# Altium PCB arduino-nano_v1.PcbDoc
Units mil, origin at the board's own origin, x right, y up, seen from the top; angles counter-clockwise.
Board outline 720 x 1780 mil, 8 copper layers (Top Layer, VCC, Signal Layer Top, Signal Layer Middle - 1, Signal Layer Middle - 2, Signal Layer Bottom, GND, Bottom Layer), stack 46.066 mil thick; 25 components, 42 nets, 165 pads, 78 vias.
Unrouted connection lines stored in the file: 18.
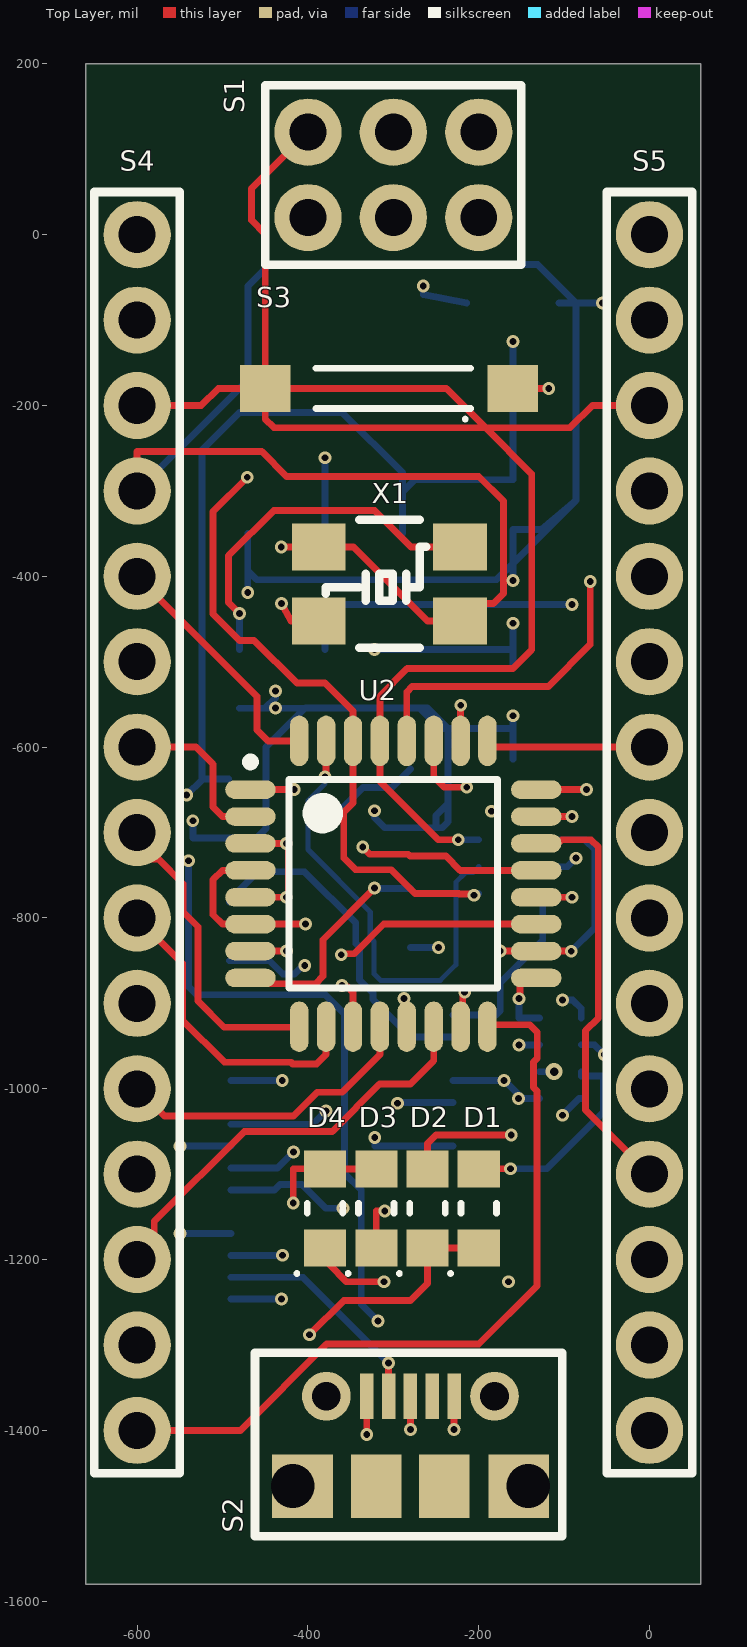
[diagram p0: Top Layer view]
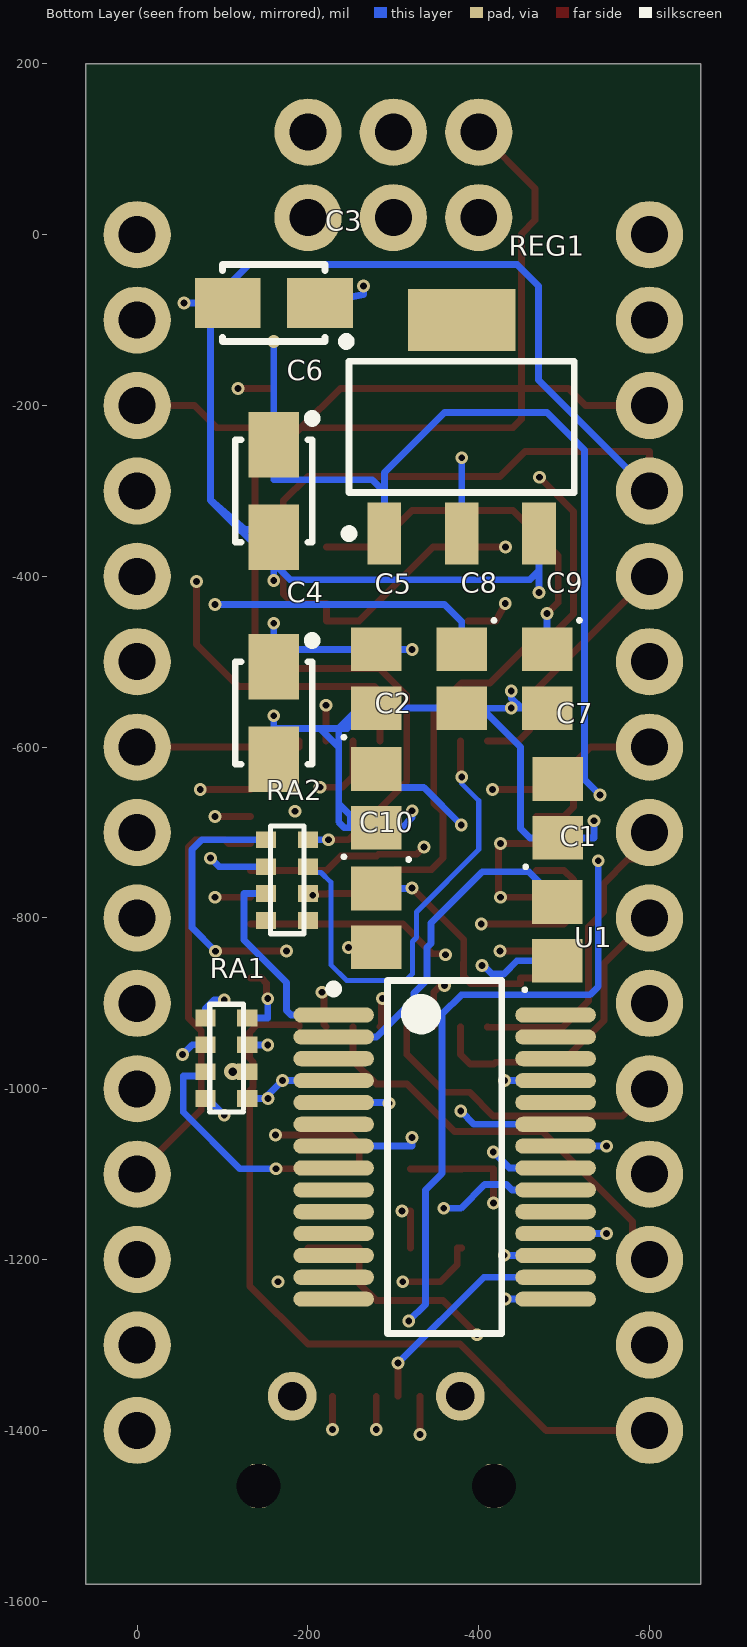
[diagram p1: Bottom Layer view, seen from below]
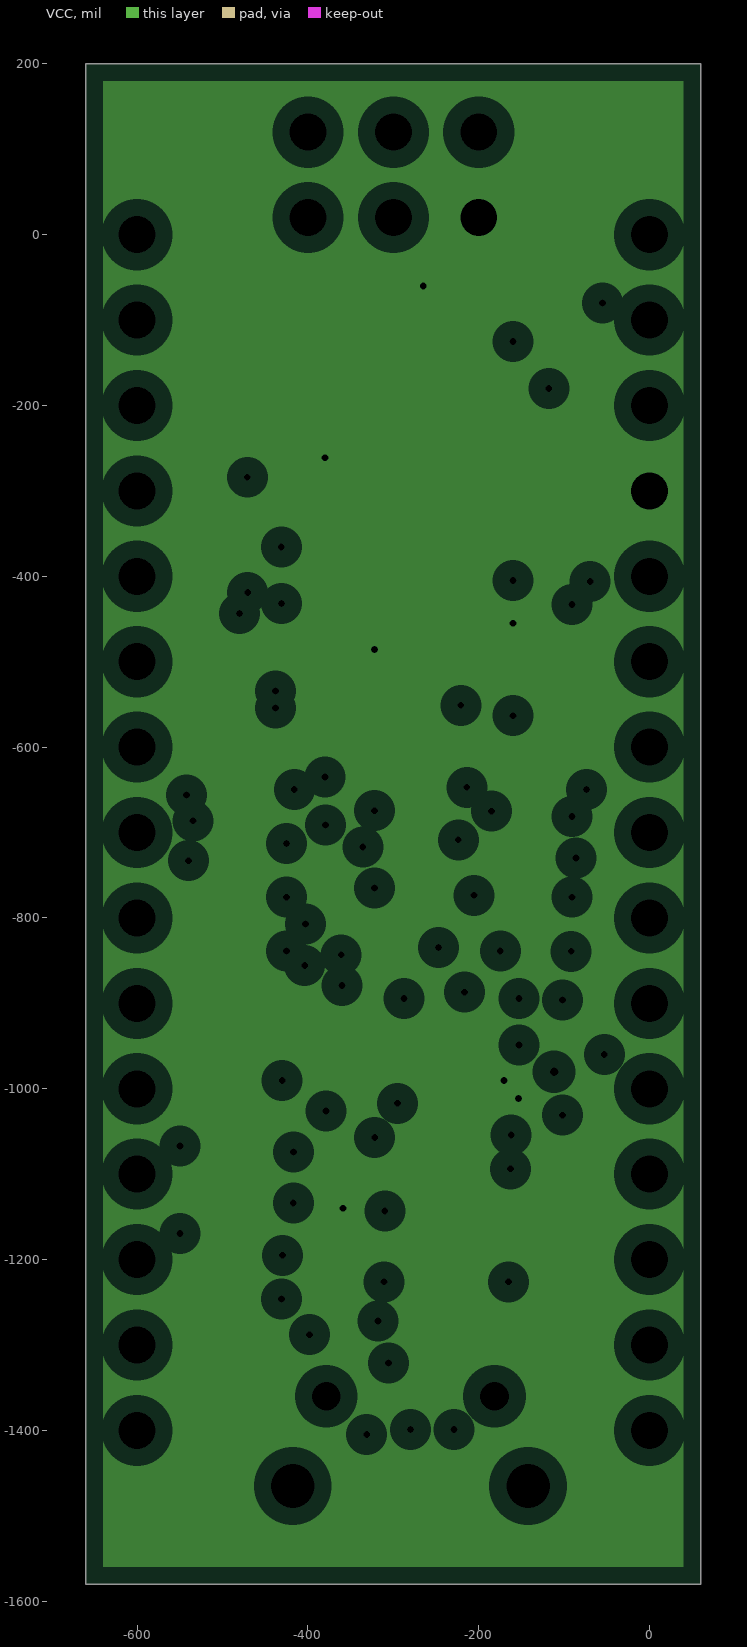
[diagram p2: VCC, clearances drawn from the general rule]
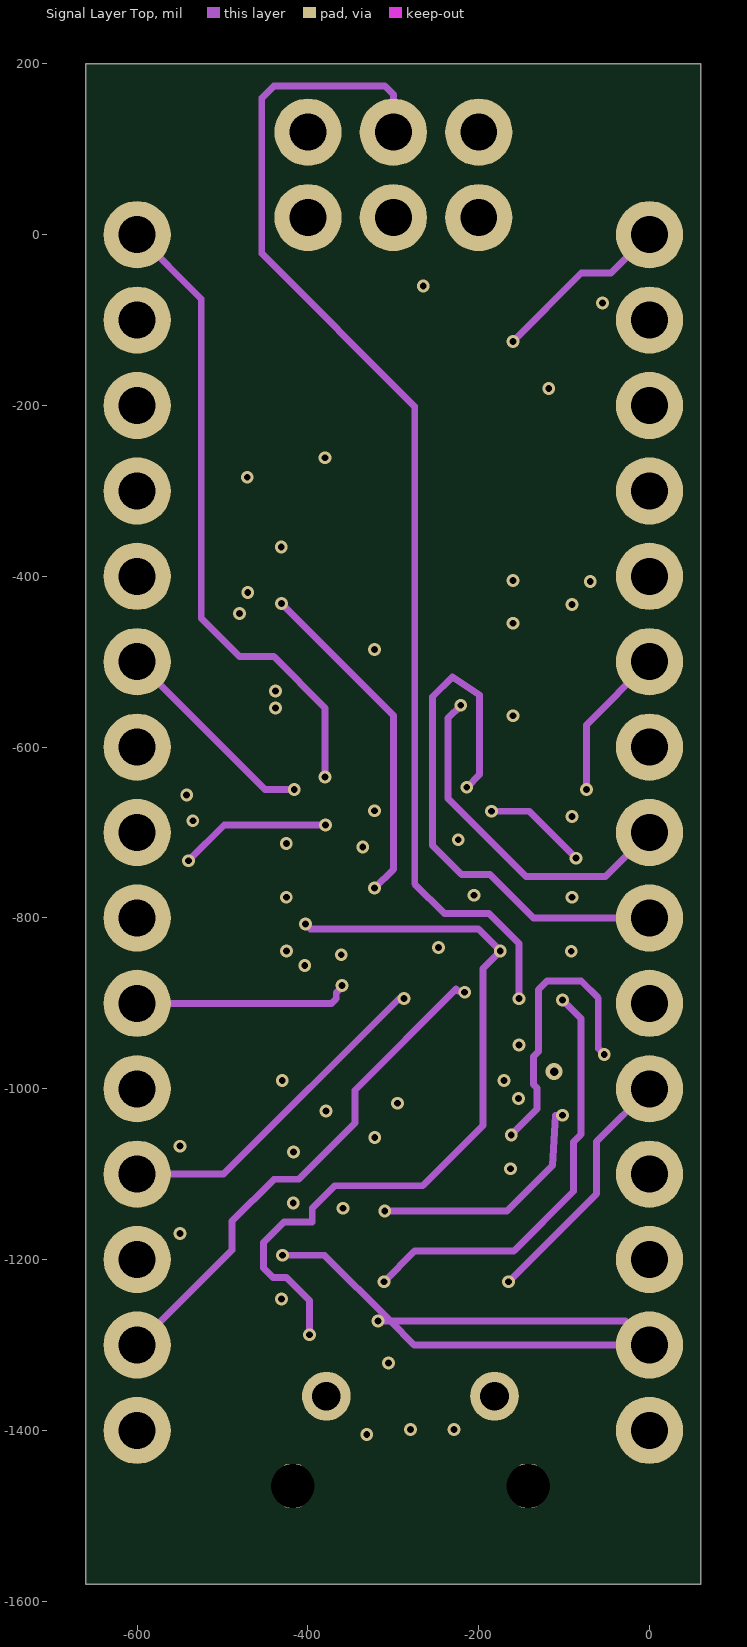
[diagram p3: Signal Layer Top]
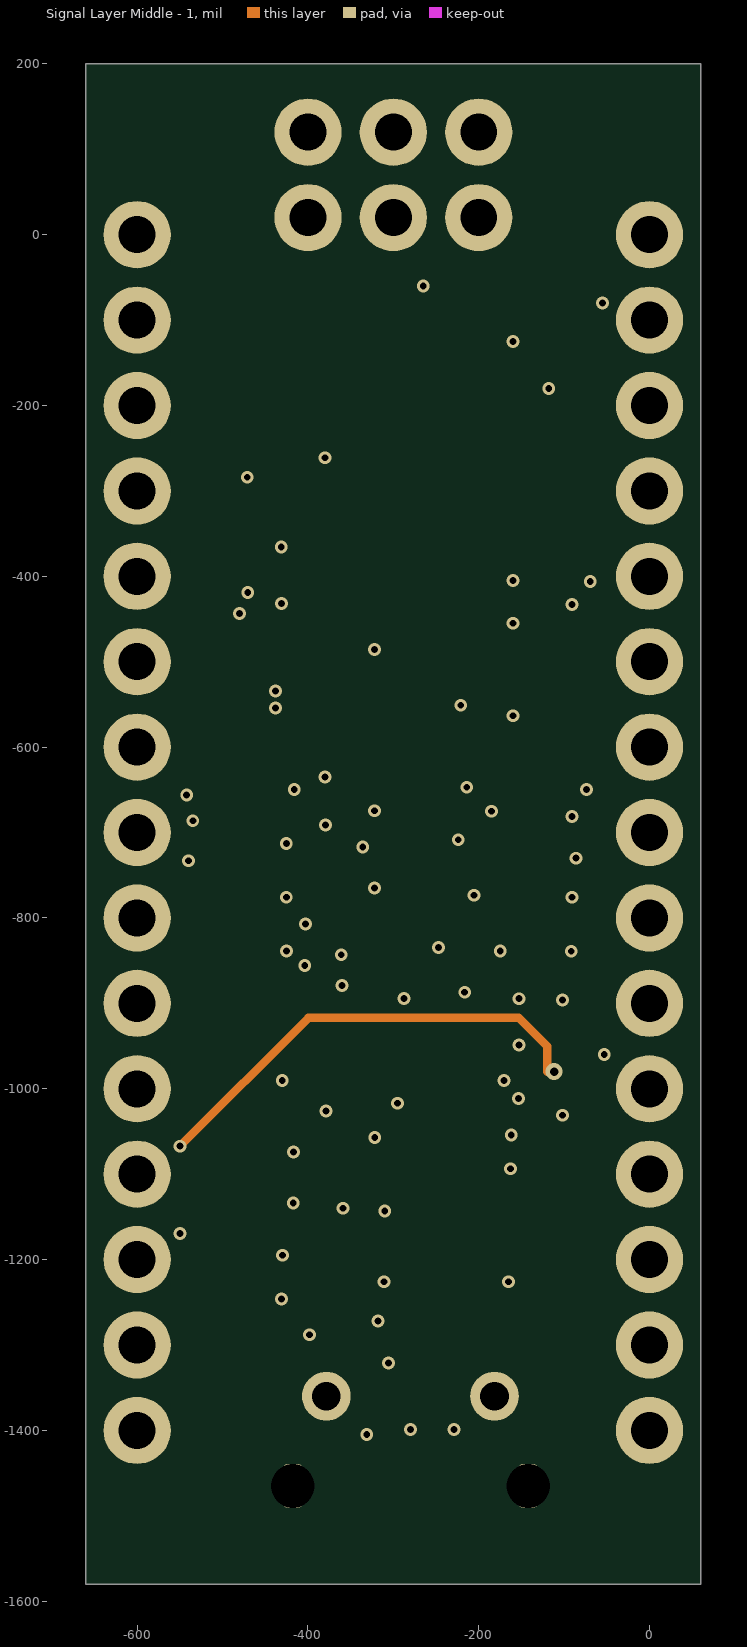
[diagram p4: Signal Layer Middle - 1]
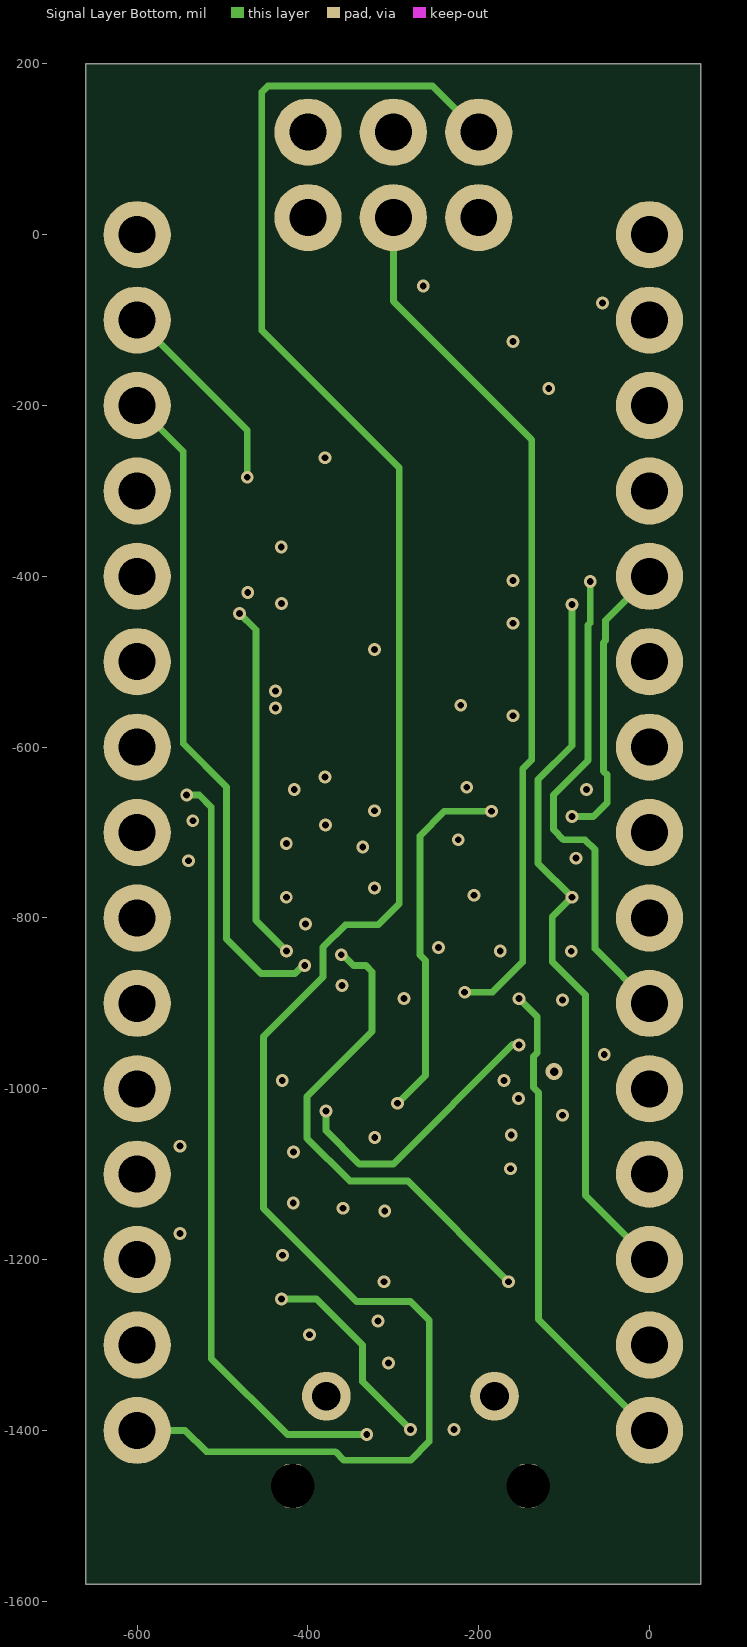
[diagram p5: Signal Layer Bottom]
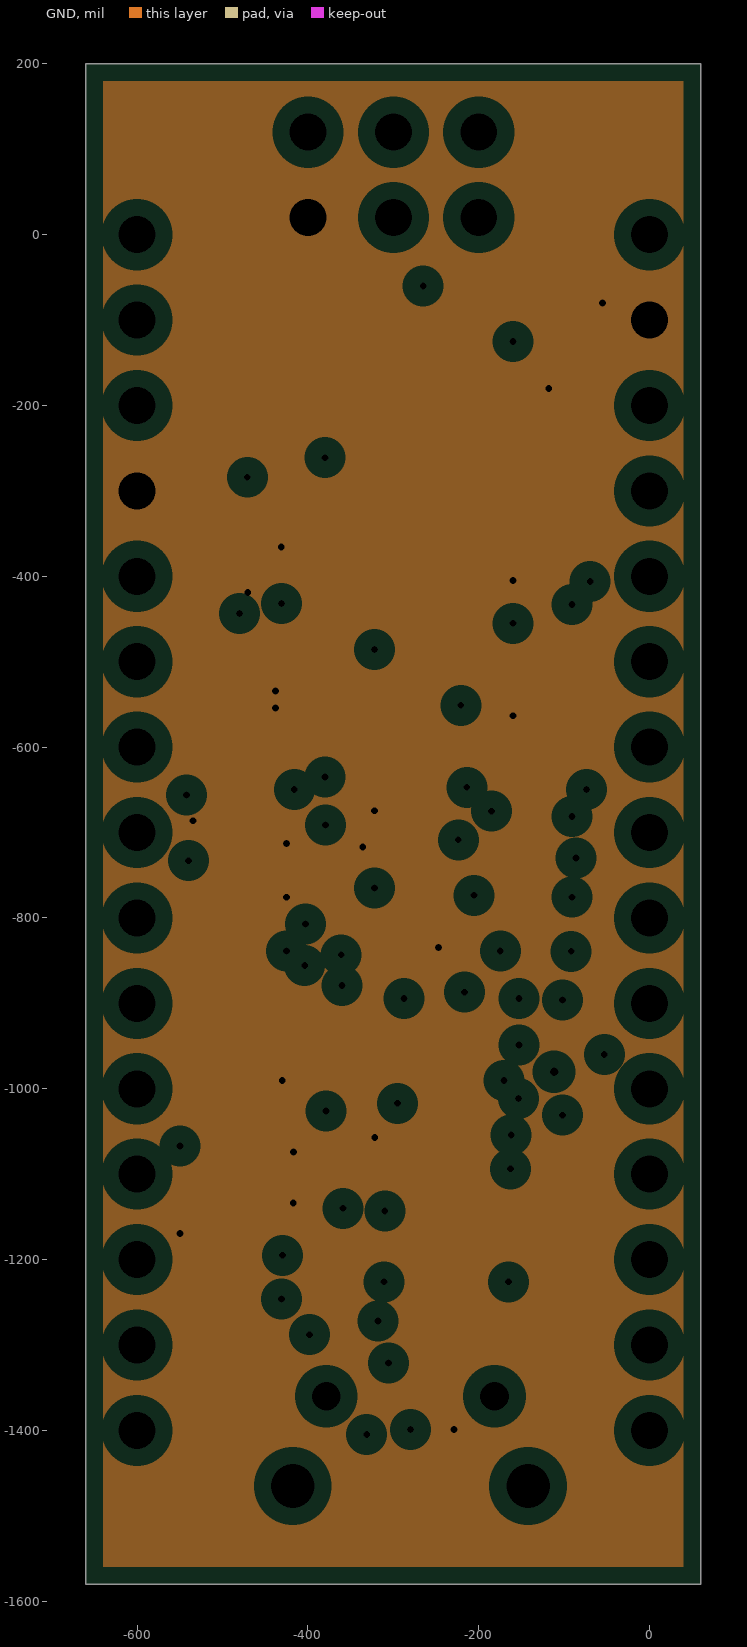
[diagram p6: GND, clearances drawn from the general rule]

## Layer stack, top to bottom
Top Solder: solder mask 0.4, Solder Resist, Dk 3.5
Top Layer: signal copper 1.4
Dielectric 2: prepreg 2.8, PP-006, Dk 4.1
VCC: plane copper 1.378, net 5V
Dielectric 6: prepreg 2.8, PP-006, Dk 4.1
Signal Layer Top: signal copper 1.378
Dielectric 8: prepreg 2.8, PP-006, Dk 4.1
Signal Layer Middle - 1: signal copper 1.378
Dielectric 4: prepreg 2.8, PP-006, Dk 4.1
Dielectric 1: dielectric 12.5984, FR-4, Dk 4.8
Dielectric 5: prepreg 2.8, PP-006, Dk 4.1
Signal Layer Middle - 2: signal copper 1.378
Dielectric 9: prepreg 2.8, PP-006, Dk 4.1
Signal Layer Bottom: signal copper 1.378
Dielectric 7: prepreg 2.8, PP-006, Dk 4.1
GND: plane copper 1.378, net GND
Dielectric 3: prepreg 2.8, PP-006, Dk 4.1
Bottom Layer: signal copper 1.4
Bottom Solder: solder mask 0.4, Solder Resist, Dk 3.5

## Board outline
-660,-1580 60,-1580 60,200 -660,200

## Design rules (kind name [scope] priority, off if disabled: settings)
Clearance [All] p1: gap=10 ignorepadtopadclearanceinfootprint=FALSE except(0: Arc-Hole Track-Hole SMDPad-Hole THPad-Hole Via-Hole Fill-Hole Poly-Hole Region-Hole Text-Hole)
PlaneClearance [All] p1: clearance=20
PlaneConnect [All] p1: planeconnectstyle=Relief reliefexpansion=20 reliefentries=4 reliefconductorwidth=10 reliefairgap=10
PolygonConnect [All] p1: connectstyle=Relief reliefconductorwidth=10 reliefentries=4 polygonreliefangle="90 Angle" airgapwidth=10
RoutingVias [All] p1: holewidth=8 width=15 viastyle="Through Hole" minholewidth=5 minwidth=10 maxholewidth=10 maxwidth=20
SolderMaskExpansion [All] p1: expansion=4 istentingtop=FALSE
Width [All] p1: maxlimit=8 minlimit=6 preferedwidth=8 midlayer1_minwidth=8 midlayer2_minwidth=8 midlayer3_minwidth=8 midlayer4_minwidth=8 minimp=50.000000 maximp=50.000000 favimp=50.000000
28 further rules are at their usual default settings.

## Components (designator, comment, footprint, x,y, rotation, side; value= is the part's Value field where it differs from the comment)
C1 "100nF Ceramic Multilayer Capacitor_1" CAPCP2012X09N -491.87,-815.68 r90 bottom
C2 "100nF Ceramic Multilayer Capacitor_1" CAPCP2012X09N -280,-660 r90 bottom
C3 "Capacitor SMT Tantalum" "CASE A - 3216X18" -160,-80 r0 bottom value=4.7µF
C4 "Capacitor SMT Tantalum" "CASE A - 3216X18" -160,-560 r270 bottom value=4.7µF
C5 "100nF Ceramic Multilayer Capacitor_1" CAPCP2012X09N -280,-520 r90 bottom
C6 "Capacitor SMT Tantalum" "CASE A - 3216X18" -160,-300 r270 bottom value=4.7µF
C7 "100nF Ceramic Multilayer Capacitor_1" CAPCP2012X09N -492.75,-671.76 r90 bottom
C8 "100nF Ceramic Multilayer Capacitor_1" CAPCP2012X09N -380,-520 r270 bottom
C9 "C0805C180J5GACTU" CAPCP2012X09N -480,-520 r270 bottom
C10 "C0805C180J5GACTU" CAPCP2012X09N -280,-800 r270 bottom
D1 "Kingbright Green LED, 70 mcd 120 ° 0805" LED1913X12NGREEN -200,-1140 r90 top
D2 "Kingbright Red LED, 100 mcd 120 ° 0805" LED1913X12NRED -260,-1140 r90 top
D3 "Kingbright Blue LED, 60 mcd 120 ° 0805" LED1913X12NBLUE -320,-1140 r90 top
D4 "Kingbright Orange LED, 200 mcd 120 ° 0805" LED1913X12NYEL/ORANGE -380,-1140 r90 top
RA1 "1k +- 5% SMT Resistor Array" "1206 RA" -124,-917.01 r270 bottom
RA2 "1k +- 5% SMT Resistor Array" "1206 RA" -195,-708.5 r270 bottom
REG1 "LM1117MP-5.0/NOPB, Low Dropout Voltage Regulator, 1.5A, 5 V ±1%, 4-Pin SOT-223" SOT230P700X180-4N -380,-225 r90 bottom
S1 "Programming Headers Dual Row" "ISP HEADER" 495,-435 r180 top
S2 "NewMolex Right Angle SMT Female Type B Micro USB Connector, 30 V ac, 1.8A" MicroUSB -328.42,-1360 r0 top
S3 "Tactile Switch SPST- NO 0.05A @24V" Button8014X17N -300,-180 r180 top
S4 "connector;str header;single row;.1 cont centers;.095 tail;gold or gtx;36 contact" Header -600,0 r270 top
S5 "connector;str header;single row;.1 cont centers;.095 tail;gold or gtx;36 contact" Header 0,0 r270 top
U1 "FT232RL, Universal Asynchronous Receiver & Transmitter 3MBd, 28-Pin, SSOP" SOP65P780X200-28N -360,-1080 r180 bottom
U2 "ATMEGA328P-AU" TQFP80P900X900X120-32N -300,-760 r0 top
X1 "Aker 16MHz Crystal SMT" "Aker S5C Crystal" -221.89,-365.51 r0 top value=16MHz

## Footprints (in the part's own frame and the unit in brackets; to place one, negate y for a bottom-side part, rotate by r counter-clockwise, add the part's x,y. Pads: shape width x height; smd on the part's side, far side on the other; paste and mask are expansions set on the pad)
"1206 RA" [mm]
  rect 0.5x0.6 smd: 1(0,0.127) 2(0.8,0.127) 3(1.6,0.127) 4(2.4,0.127) 5(0,-1.118) 6(0.8,-1.118) 7(1.6,-1.118) 8(2.4,-1.118)
  silkscreen extent -0.41,-0.99 2.79,0.01, body extent -0.41,-1.31 2.79,0.29, height 0.5
"Aker S5C Crystal" [mm]
  rect 1.6x1.4 smd: 1(0,0) 2(-4.2,0) 3(0,-2.2) 4(-4.2,-2.2)
  round 0.254 on Top Overlay: 5(-3,-2.4)
  silkscreen extent -4,-3 -1,0.8, body extent -4.7,-2.8 0.5,0.6, height 1
Button8014X17N [mm] "Chip Inductor, 2-Leads, Body 8.00x1.40mm, IPC Medium Density"
  rect 1.5x1.4 smd: 1(-3.556,0) 2(3.81,0)
  silkscreen extent -2.3,-0.6 2.3,0.96, body extent -3.79,-1.92 4.21,1.78, height 2.5
CAPCP2012X09N [mm] "Chip Capacitor, 2-Leads, Body 2.00x1.25mm, IPC Medium Density"
  rect 1.3x1.5 smd: 1(-0.875,0) 2(0.875,0)
  silkscreen extent -1.79,0.91 -1.69,1.01, body extent -1.05,-0.57 0.95,0.68, height 0.78
"CASE A - 3216X18" [mm] "Molded Capacitor, 2-Leads, Body 3.2x1.6mm, IPC Medium Density"
  rect 1.95x1.5 smd: 1(-1.375,0) 2(1.375,0)
  silkscreen extent -2.28,-1.14 1.52,1.27, body extent -1.52,-0.76 1.65,0.84, height 1.77
Header [mm] "SIL Header"
  round 2 hole 1.1: 1(0,0) 2(2.54,0) 3(5.08,0) 4(7.62,0) 5(10.16,0) 6(12.7,0) 7(15.24,0) 8(17.78,0) 9(20.32,0) 10(22.86,0) 11(25.4,0) 12(27.94,0) 13(30.48,0) 14(33.02,0) 15(35.56,0)
  silkscreen extent -1.27,-1.27 36.83,1.27, body extent -1.33,-1.35 36.93,1.35, height 8.6
"ISP HEADER" [mm] "SIL Header for programming"
  round 2 hole 1.1: 1(17.653,-14.097) 2(17.653,-11.557) 3(20.193,-14.097) 4(20.193,-11.557) 5(22.733,-14.097) 6(22.733,-11.557)
  silkscreen extent 16.38,-15.49 24,-10.16, body extent 16.38,-15.37 24,-10.29, height 8
LED1913X12NBLUE [mm] "LED 2-Leads, Body 1.90x1.32mm, IPC Medium Density"
  rect 1.1x1.25 smd: 1(-1.175,0) 2(1.175,0)
  silkscreen extent -1.99,-0.53 0.15,0.89, body extent -1,-0.62 1.02,0.62, height 1.1
LED1913X12NGREEN [mm] "LED 2-Leads, Body 1.90x1.32mm, IPC Medium Density"
  rect 1.1x1.25 smd: 1(-1.175,0) 2(1.175,0)
  silkscreen extent -1.99,-0.53 0.15,0.89, body extent -1.01,-0.62 1.01,0.63, height 1.1
LED1913X12NRED [mm] "LED 2-Leads, Body 1.90x1.32mm, IPC Medium Density"
  rect 1.1x1.25 smd: 1(-1.175,0) 2(1.175,0)
  silkscreen extent -1.99,-0.53 0.15,0.89, body extent -1.02,-0.43 1.04,0.47, height 0.85
LED1913X12NYEL/ORANGE [mm] "LED 2-Leads, Body 1.90x1.32mm, IPC Medium Density"
  rect 1.1x1.25 smd: 1(-1.175,0) 2(1.175,0)
  silkscreen extent -1.99,-0.53 0.15,0.89, body extent -1.01,-0.62 1.01,0.63, height 1.1
MicroUSB [mm] "MicroUSB  Molex 5Pin"
  rect 0.4x1.35 smd: 1(-0.07,0) 2(0.58,0) 3(1.23,0) 4(1.88,0) 5(2.53,0)
  rrect50% 0.6x1.3 hole 1.3: ""(-2.27,-2.667) ""(-2.27,-2.667) ""(4.73,-2.667)
  rect 1.8x1.9 smd: ""(-1.98,-2.678) ""(4.45,-2.678)
  round 1.45 hole 0.85: ""(-1.27,0) ""(3.73,0)
  rect 1.5x1.9 smd: ""(0.218,-2.678) ""(2.242,-2.678)
  silkscreen extent -3.39,-4.17 5.75,1.3, body extent -2.83,-5.32 5.37,0.11, height 2.68
SOP65P780X200-28N [mm] "SOP, 28-Leads, Body 10.20x5.30mm, Pitch 0.65mm, IPC Medium Density"
  oval 2.4x0.45 smd: 1(-3.3,4.225) 2(-3.3,3.575) 3(-3.3,2.925) 4(-3.3,2.275) 5(-3.3,1.625) 6(-3.3,0.975) 7(-3.3,0.325) 8(-3.3,-0.325) 9(-3.3,-0.975) 10(-3.3,-1.625) 11(-3.3,-2.275) 12(-3.3,-2.925) 13(-3.3,-3.575) 14(-3.3,-4.225) 15(3.3,-4.225) 16(3.3,-3.575) 17(3.3,-2.925) 18(3.3,-2.275) 19(3.3,-1.625) 20(3.3,-0.975) 21(3.3,-0.325) 22(3.3,0.325) 23(3.3,0.975) 24(3.3,1.625) 25(3.3,2.275) 26(3.3,2.925) 27(3.3,3.575) 28(3.3,4.225)
  silkscreen extent -3.43,-5.25 1.7,5.25, body extent -3.91,-5.1 3.91,5.1, height 2
SOT230P700X180-4N [mm] "SOT223, 4-Leads, Body 6.50x7.00mm (avg), Pitch 2.30mm, IPC Medium Density"
  rect 1.85x1 smd: 1(-3.175,2.3) 2(-3.175,0) 3(-3.175,-2.3)
  rect 1.85x3.2 smd: 4(3.175,0)
  silkscreen extent -3.3,-3.35 1.95,3.48, body extent -3.8,-3.12 3.29,3.38, height 1.65
TQFP80P900X900X120-32N [mm] "TQFP, 32-Leads, Body 7.00x7.00mm, Pitch 0.80mm, IPC Medium Density"
  oval 1.5x0.55 smd: 1(-4.25,2.8) 2(-4.25,2) 3(-4.25,1.2) 4(-4.25,0.4) 5(-4.25,-0.4) 6(-4.25,-1.2) 7(-4.25,-2) 8(-4.25,-2.8) 17(4.25,-2.8) 18(4.25,-2) 19(4.25,-1.2) 20(4.25,-0.4) 21(4.25,0.4) 22(4.25,1.2) 23(4.25,2) 24(4.25,2.8)
  oval 0.55x1.5 smd: 9(-2.8,-4.25) 10(-2,-4.25) 11(-1.2,-4.25) 12(-0.4,-4.25) 13(0.4,-4.25) 14(1.2,-4.25) 15(2,-4.25) 16(2.8,-4.25) 25(2.8,4.25) 26(2,4.25) 27(1.2,4.25) 28(0.4,4.25) 29(-0.4,4.25) 30(-1.2,4.25) 31(-2,4.25) 32(-2.8,4.25)
  silkscreen extent -4.37,-3.1 3.1,3.75, body extent -4.43,-4.5 4.57,4.5, height 1.6

## Part data
C1 C2 C5 C7 C8: "AVX 0805 Standard 100nF Ceramic Multilayer Capacitor, 50 V dc X7R Dielectric ±10% SMD", Capacitance=100nF, Manufacturer=AVX, Package=0805, Voltage=50V, Creator="Ritesh Kanjee", Datasheet URL=http://za.rs-online.com/web/p/ceramic-multilayer-capacitors/4646688/, Date Created="18 February 2015", RS Stock No.=464-6688
C3 C4 C6: library part "4.7µF Tant RS 496-3545", "Capacitor,tantalum,SMT,16V,4.7uF,10%,A-case", Package=3216-18, Tolerance=10%, Voltage=16V, ComponentLink1Description="Supplier Website", ComponentLink1URL=http://za.rs-online.com/web/search/searchBrowseAction.html?method=getProduct&R=4963545, ComponentLink2Description="RS Data sheet", ComponentLink2URL=http://docs-europe.origin.electrocomponents.com/webdocs/04ed/0900766b804ed4cc.pdf, LatestRevisionDate=28-April-2010, Part Originator="H Theron", Publisher=DPSS, RS Stock Nr.=496-3545
C9 C10: library part "18pF Ceramic Multilayer Capacitor, 50 V dc C0G Dielectric ±5% SMD", "18pF Ceramic Multilayer Capacitor, 50 V dc C0G Dielectric ±5% SMD", Capacitance=18pF, Manufacturer=Kemet, Package=0805, Voltage=50V, Creator="Ritesh Kanjee", Datasheet URL=http://za.rs-online.com/web/p/ceramic-multilayer-capacitors/6480935/?searchTerm=C0805C180J5GACTU&relevancy-data=636F3D3226696E3D4931384E4B6E6F776E41734D504E266C753D656E266D6D3D6D61746368616C6C7061727469616C26706D3D5E5B5C707B4C7D5C707B4E647D2D2C2F255C2E5D2B2426706F3D313326736E3D592673743D4D414E5F504152545F4E554D4245522677633D424F5448267573743D4330383035433138304A35474143545526, Date Created="18 February 2015", RS Stock No.=648-0935
D1: Color=Green, Forward Voltage="2.1 V", Manufacturer=KingBright, Manufacturer Part No.=KP-2012MGC, Creator="Ritesh Kanjee", Datasheet URL=http://za.rs-online.com/web/p/visible-leds/4663778/, Date Created="18 February 2015", RS Stock No.=466-3778
D2: Color=RED, Forward Voltage=1.85V, Manufacturer=KingBright, Manufacturer Part No.=KP-2012SRC-PRV, Creator="Ritesh Kanjee", Datasheet URL=http://za.rs-online.com/web/p/visible-leds/4663813/, Date Created="18 February 2015", RS Stock No.=466-3813
D3: Color=Blue, Forward Voltage=3.2V, Manufacturer=KingBright, Manufacturer Part No.=KP-2012PBC-A, Creator="Ritesh Kanjee", Datasheet URL=http://za.rs-online.com/web/p/visible-leds/4663784/, Date Created="18 February 2015", RS Stock No.=466-3784
D4: Color=Orange, Forward Voltage=1.85V, Manufacturer=KingBright, Manufacturer Part No.=KP-2012SEC, Creator="Ritesh Kanjee", Datasheet URL=http://za.rs-online.com/web/p/visible-leds/4663790/, Date Created="18 February 2015", RS Stock No.=466-3790
RA1 RA2: "1k +- 5% SMT Resistor Array 4 Res", Manufacturer=Bourns, Manufacturer Part No.=CAY16-102J4LF, Creator="R Kanjee", Date Created="25 February 2015", RS Stock No.=552-5579, Wattage=0.25W
REG1: library part LM1117MP-5.0, Manufacturer="Texas Instruments", Maximum Input Voltage=15V, Output Voltage=5V, Supply Current=1.5Amps, Created By="R Kanjee", Datasheet URL=http://za.rs-online.com/web/p/low-dropout-voltage-regulators/5339583/, Date Created="26 February 2015", RS Stock No.=533-9583
S1: library part "Programming ISP, Programming Headers Dual Row", Current Rating="3Amps Continuous", Manufacturer=FCI, Manufacturer Part No.=68000-236HLF, Created By="R Kanjee", Date Created="1 March 2015", RS Stock No.=2509565626
S2: library part "Micro USB Connector, 30 V ac, 1.8A", Manufacturer=Molex, Manufacturer Part No.=105017-0001, Max Current=1.8A, Max Voltage=30V, Creator="R Kanjee", Datasheet URL=http://za.rs-online.com/web/p/micro-usb-connectors/8486764/, Date Created="28 February 2015", RS Stock No=848-6764
S3: Manufacturer=Omron, Manufacturer Part No.=B3F1000, Creator="R Kanjee", Date Created="25 February 2015", RS Stock No.=686-6847, State="Normaly Open"
S4 S5: library part "Single row; PCB headers", Current Rating="3Amps Continuous", Manufacturer=FCI, Manufacturer Part No.=68000-236HLF, Created By="R Kanjee", Date Created="1 March 2015", RS Stock No.=2509565626
U1: library part "FT232RL USB to UART, Universal Asynchronous Receiver & Transmitter 3MBd, 28-Pin, SSOP", Manufacturer="FTDI Chip", Manufacturer Part No.=FT232RL, Creator="R Kanjee", Date Created="03 March 2015", Pin Count=28, RS Stock No.=406-580
U2: "Microchip ATMEGA328P-AU, 8bit AVR Microcontroller, 20MHz, 1 kB, 32 kB Flash, 32-Pin TQFP", Company=ComputeChip, Created By="Rajiv Bishwokarma", Datasheet URL=https://docs.rs-online.com/5775/0900766b80db4deb.pdf, Date Created="December 31, 2020", RS Stock No.=696-3092
X1: library part "Aker  C5S-16.000-12-3030-X", "Aker S5C SMT Crystal", Frequency Stability=+/-30ppm, Load Capacitance=12pF, Manufacturer=Aker, Manufacturer Part #=C5S-16.000-12-3030-X, Package="3.2x5mm SMD", Creator="R Kanjee", HelpURL=http://za.rs-online.com/web/p/crystal-units/6719488/, RS="RS 671-9488", RS Stock Nr.=671-9488, Supplier=RS

## Via types
v1: diameter 15, hole 8, Top Layer to Bottom Layer, 77 vias
v2: diameter 20, hole 10, Top Layer to Bottom Layer, 1 vias

## Nets (pads, with @x,y where several pads share a name; then routed paths per layer and width w, separated by ;. In a path a pad name is that pad's centre, name@x,y a point inside that pad or via, vN(x,y) a via of type N, cw(c..) or ccw(c..) an arc to the next point about the centre after c; other vN are vias at no path point)
3V3: C2.2 S5.14 U1.17 | length 1886.7
  Signal Layer Top w8: v1(-540,-733) -498,-691 v1(-379.5,-691) ; v1(-429.84,-1195) -380.54,-1195 -303.54,-1272 ; v1(-318,-1272) -303.54,-1272 ; -303.54,-1272 -28,-1272 S5.14 -275.54,-1300 -303.54,-1272
  Bottom Layer w8: v1(-540,-733) -540,-880 -530,-890 -379.53,-890 -357,-912.53 -357,-1099 -337.5,-1118.5 -337.5,-1252.5 v1(-318,-1272) ; U1.17 -430,-1195.16 v1(-429.84,-1195) ; v1(-379.5,-691) -335.64,-647.14 -301.59,-647.14 C2.2
5V: C3.1 C4.1 C5.2 RA1.4 REG1.2 S1.2 S5.4 U1.4 U1.20 | length 663.3
  Bottom Layer w8: U1.20 -439,-1118.39 -432.61,-1112 -407,-1112 -379,-1140 v1(-359,-1140) ; REG1.2 v1(-380,-261.08) ; v1(-322.03,-485.55) C5.2 -160,-485.55 C4.1 v1(-160,-454.98) ; v1(-265.02,-60) -265.02,-70 C3.1 ; U1.4 v1(-170.33,-990.43) -170,-990.43 -148.94,-1011.5 RA1.4 v1(-153.31,-1011.5)
+5: D1.1 D2.1 RA2.5 U2.4 U2.6 U2.18 | length 1688.3
  Top Layer w8: U2.4 -500,-744.25 -511,-755.25 -511,-796.24 -500,-807.24 U2.6 v1(-403,-807.24) ; v1(-398,-1288) -358,-1248 -280,-1248 -260,-1228 D2.1 D1.1 ; v1(-174.74,-838.74) U2.18 -92,-838.74 v1(-91.74,-839)
  Signal Layer Top w8: v1(-403,-807.24) -397.3,-812.95 -200.53,-812.95 v1(-174.74,-838.74) -195,-859 -195,-1043 -265.5,-1113.5 -368.5,-1113.5 -395,-1140 -395,-1156 -428,-1156 -452,-1180 -452,-1210 -441,-1221 -425,-1221 -398,-1248 v1(-398,-1288)
  Bottom Layer w8: RA2.5 -107.5,-708.5 -75.65,-708.5 -64.15,-720 -64.15,-811.41 v1(-91.74,-839)
A0: S5.5 U2.23 | length 379.1
  Top Layer w8: U2.23 v1(-91,-681.26)
  Signal Layer Bottom w8: v1(-91,-681.26) -65.84,-681.26 -49.5,-664.92 -49.5,-632.76 -54,-628.26 -54,-477.75 -51.5,-475.25 -51.5,-451.5 S5.5
A1: S5.6 U2.24 | length 239.1
  Top Layer w8: U2.24 v1(-74,-649.76)
  Signal Layer Top w8: v1(-74,-649.76) -74,-574 S5.6
A2: S5.7 U2.25 | length 197.1
  Top Layer w8: U2.25 -189.76,-600 S5.7
A3: S5.8 U2.26 | length 452.2
  Top Layer w8: U2.26 -221.26,-551.26 v1(-221,-551)
  Signal Layer Top w8: v1(-221,-551) -236,-566 -236,-660 -144.5,-751.5 -51.5,-751.5 S5.8
A4: S5.9 U2.27 | length 733.8
  Top Layer w8: U2.27 -252.76,-634.24 -240,-647 v1(-214,-647)
  Signal Layer Top w8: v1(-214,-647) -199,-632 -199,-539 -231,-518 -254,-541 -254,-715 -220,-749 -187,-749 -136,-800 S5.9
A5: S5.10 U2.28 | length 942.1
  Top Layer w8: U2.28 -284.25,-535.25 -278,-529 -118.5,-529 -69.5,-480 v1(-69.5,-406)
  Signal Layer Bottom w8: v1(-69.5,-406) -69.5,-454.5 -72,-457 -72,-615.5 -112.5,-656 -112.5,-696.5 -100.5,-708.5 -75.5,-708.5 -64,-720 -64,-836 S5.10
A6: S5.11 U2.19 | length 1113.9
  Top Layer w8: v1(-361.03,-843.17) -359.86,-842 -346,-842 -311.24,-807.24 U2.19
  Signal Layer Top w8: v1(-165,-1226) -62,-1123 -62,-1062 S5.11
  Signal Layer Bottom w8: v1(-361.03,-843.17) -359.13,-843.17 -346.48,-855.82 -332.18,-855.82 -325,-863 -325,-933 -401,-1009 -401,-1058 -351,-1108 -283,-1108 v1(-165,-1226)
A7: S5.12 U2.22 | length 498.3
  Top Layer w8: U2.22 -107.15,-712.76 -102.89,-708.5 -68.41,-708.5 -60,-716.91 -60,-917 -75,-932 -75,-1025 S5.12
AREF: C8.1 S5.13 U2.20 | length 1228
  Top Layer w8: U2.20 v1(-91,-775.75)
  Signal Layer Bottom w8: v1(-91,-433) -91,-598.38 -130.5,-637.88 -130.5,-736.25 v1(-91,-775.75) -114,-798.75 -114,-851 -75,-890 -75,-1125 S5.13
  Bottom Layer w8: C8.1 -380,-453 -360,-433 v1(-91,-433)
D0/RX: RA2.3 S4.2 U2.30 | length 978.4
  Top Layer w8: v1(-471,-284) -511,-324 -511,-444 -480,-475 -463,-475 -413,-525 -380,-525 -347.24,-557.76 U2.30 -347.24,-665.45 -358,-676.21 -358,-730 -344.5,-743.5 -302.5,-743.5 -274.5,-771.5 -223.5,-771.5 -222.89,-772.11 -207.05,-772.11 v1(-205.71,-773.45)
  Signal Layer Bottom w8: S4.2 -471,-229 v1(-471,-284)
  Bottom Layer w8: v1(-205.71,-773.45) -201.95,-773.45 RA2.3
D1/TX: RA2.2 S4.1 U2.31 | length 1300.5
  Top Layer w8: v1(-380,-635) -378.74,-633.74 U2.31
  Signal Layer Top w8: S4.1 -525,-75 -525,-449 -480,-494 -440,-494 -380,-554 v1(-380,-635)
  Bottom Layer w6: v1(-380,-635) -380,-642.76 -400,-662.76 -400,-720 -327,-793 -327,-823 -322.53,-827.47 -322.53,-865.42 -314.91,-873.04 -245.09,-873.04 -226.81,-854.76 -226.81,-758.27 -215.38,-746.84 -206.84,-746.84 RA2.2
D2: S4.5 U2.32 | length 293.2
  Top Layer w8: S4.5 -459.5,-540.5 -459.5,-580 -446.5,-593 -410.24,-593 U2.32
D3: S4.6 U2.1 | length 297.4
  Top Layer w8: U2.1 v1(-416,-649.76)
  Signal Layer Top w8: S4.6 -450.24,-649.76 v1(-416,-649.76)
D4: S4.7 U2.2 | length 195.8
  Top Layer w8: S4.7 -531,-600 -511,-620 -511,-670.26 -500,-681.26 U2.2
D5: S4.8 U2.9 | length 373.3
  Top Layer w8: S4.8 -600,-731 -575,-731 -546,-760 -546,-792.94 -528.63,-810.31 -528.63,-897.37 -498,-928 -410.24,-928 U2.9
D6: S4.9 U2.10 | length 368.4
  Top Layer w8: S4.9 -546.63,-853.37 -546.63,-920 -497.69,-968.93 -420,-968.93 -417.93,-971 -389.74,-971 -378.74,-960 U2.10
D7: S4.10 U2.11 | length 309.9
  Top Layer w8: v1(-359.95,-879.18) -358.61,-880.51 -353.77,-880.51 -347.24,-887.04 U2.11
  Signal Layer Top w8: S4.10 -372.24,-900 -366.95,-894.71 -366.95,-888.07 -359.95,-881.07 v1(-359.95,-879.18)
D8: S4.11 U2.12 | length 360
  Top Layer w8: S4.11 -568.07,-1031.93 -416.93,-1031.93 -389,-1004 -359.74,-1004 -315.75,-960 U2.12
D9: S4.12 U2.13 | length 432.2
  Top Layer w8: v1(-287.37,-894.24) -286.03,-895.58 -286.03,-925.54 U2.13
  Signal Layer Top w8: S4.12 -499,-1100 -293.62,-894.62 -287.75,-894.62 v1(-287.37,-894.24)
D10: S4.13 U2.14 | length 509.7
  Top Layer w8: S4.13 -580,-1200 -580,-1155.48 -474.52,-1050 -371.48,-1050 -316,-994.52 -280,-994.52 -252.76,-967.28 U2.14
D11/MOSI: S1.4 S4.14 U2.15 | length 1668
  Top Layer w8: U2.15 -218.65,-924.71 -218.65,-890.95 -216.5,-888.8 v1(-216.5,-886.91)
  Signal Layer Top w8: S4.14 -489,-1189 -489,-1155 -440,-1106 -411,-1106 -345,-1040 -345,-1001.74 -226.65,-883.39 -224.47,-885.57 -217.84,-885.57 v1(-216.5,-886.91)
  Signal Layer Bottom w8: S1.4 -300,-78 -138,-240 -138,-615.27 -148.5,-625.77 -148.5,-851.69 -183.72,-886.91 v1(-216.5,-886.91)
D12/MISO: S1.1 S4.15 U2.16 | length 3400.2
  Top Layer w8: S4.15 -479,-1400 -378,-1299 -200,-1299 -131.81,-1230.81 -131.81,-1002.59 -135.81,-998.59 -135.81,-968.54 -131.41,-964.14 -131.41,-934.08 -140.5,-925 -189.76,-925 U2.16
  Signal Layer Bottom w8: S4.15 -544,-1400 -519,-1425 -368,-1425 -358,-1435 -280,-1435 -258,-1413 -258,-1271 -280,-1249 -343,-1249 -452,-1140 -452,-939 -382.24,-869.24 -382.24,-852.36 -382.53,-852.07 -382.53,-834.26 -356.26,-808 -318,-808 -293,-783 -293,-273 -454,-112 -454,167 -447,174 -254,174 S1.1
D13/SCK: RA1.1 S1.3 S5.15 U2.17 | length 2076.7
  Top Layer w8: v1(-153,-894.51) -151.66,-893.17 -151.66,-876.54 -145.35,-870.24 U2.17
  Signal Layer Top w8: S1.3 -300,164 -310,174 -440,174 -454,160 -454,-22 -275,-201 -275,-760 -240.05,-794.95 -188.05,-794.95 -153,-830 v1(-153,-894.51)
  Signal Layer Bottom w8: v1(-153,-894.51) -131.41,-916.09 -131.41,-957.82 -135.81,-962.22 -135.81,-998.59 -130,-1004.4 -130,-1270 S5.15
  Bottom Layer w8: v1(-153,-894.51) -153,-917 RA1.1
GND: C2.1 C3.2 C4.2 C5.1 C6.2 C7.1 C8.2 C9.2 C10.2 D3.2 D4.2 REG1.3 S1.6 S2.5 S3.1 S4.4 S5.2 U1.7 U1.18 U1.21 U1.25 U2.3 U2.5 U2.21 X1.2 X1.3 | length 4799
  Top Layer w8: S4.4 -600,-254 -454,-254 -425,-283 -200,-283 -171,-312 -171,-420 -183,-432 -221.89,-432 X1.3 -260,-452.13 -346.61,-365.51 X1.2 v1(-431.24,-365.51) ; U2.5 v1(-425.29,-775.75) -423,-775.75 -423,-712.76 v1(-425.29,-712.76) U2.3 ; v1(-417.11,-1133.74) -417.11,-1093.74 D4.2 -380,-1094 -320,-1094 D3.2 ; v1(-335.75,-717) -327.25,-725.5 -282.5,-725.5 -280.5,-727.5 -238.5,-727.5 -221.75,-744.25 U2.21 ; v1(-228.82,-1399.08) S2.5 ; S3.1 v1(-117.97,-180)
  Bottom Layer w8: S4.4 -470,-170 -470,-60 -445,-35 -131,-35 C3.2@-86,-80 ; v1(-549.67,-1169.57) U1.18 ; v1(-534.77,-686.21) -534.77,-706.21 C7.1 -460,-706.21 -449,-695.21 -449,-600 C8.2@-403.45,-554.45 ; U1.21 -435.8,-1092.8 v1(-417,-1074) ; U1.25 v1(-430.18,-990.43) ; C9.2 -450,-554.45 ; v1(-470.55,-418.92) REG1.3 -470.55,-393.45 -460,-404 -179,-404 C6.2@-160,-385 ; v1(-438,-554) v1@-438,-554.45 ; v1(-437.97,-534.45) -437.97,-542.42 -450,-554.45 ; v1(-322.03,-674.45) -322.03,-682.42 -310,-694.45 C2.1 -250,-694.45 ; v1(-321.87,-1057) -321.87,-1067.2 U1.7 ; C10.2 v1(-247.31,-834.45) ; v1(-160,-563.25) C4.2 -160,-578 -214,-578 ; v1(-160,-405.02) C6.2 ; v1(-54.98,-80) C3.2 C3.2@-86,-80 ; -450,-554.45 v1@-438,-554.45 ; v1@-438,-554.45 C8.2@-403.45,-554.45 ; v1@-438,-554.45 C8.2 ; C8.2@-403.45,-554.45 -403,-554 C8.2@-380,-554 ; C8.2@-403.45,-554.45 C8.2 ; C8.2 C8.2@-380,-554 ; C8.2 C5.1 ; C8.2@-380,-554 C5.1@-280,-554 ; C5.1 C5.1@-280,-554 ; C5.1 -269.55,-554.45 -246,-578 -236,-578 ; C5.1@-280,-554 -260,-554 -236,-578 ; -250,-694.45 -250,-680 -236,-666 ; -250,-694.45 -243,-694.45 -236,-687.45 -236,-666 ; -236,-666 -236,-600 ; -236,-600 -214,-578 ; -236,-600 -236,-578 ; -236,-578 -214,-578 ; C6.2@-160,-385 -86,-311 ; C6.2@-160,-385 C6.2 ; C6.2 -160,-345 -126,-345 -86,-311 ; -86,-311 C3.2@-86,-80
GREEN_TX: RA1.3 U1.22 | length 620.7
  Signal Layer Middle - 1 w10: v1(-549.67,-1067.2) -399.47,-917.01 -153,-917.01 -120,-950.01 -120,-980 v2(-111.81,-980)
  Bottom Layer w8: v1(-549.67,-1067.2) U1.22 ; RA1.3 v2(-111.81,-980)
NetC1_2: C1.2 U1.2 | length 398.3
  Bottom Layer w8: C1.2 -491.87,-779 -458.87,-746 -404,-746 -344,-806 -344,-830.04 -339.53,-834.51 -339.53,-872.46 -324,-887.99 -324,-895.25 -280,-939.25 U1.2
NetC9_1: C9.1 U2.7 X1.1 | length 886.2
  Top Layer w8: v1(-480,-443.55) -493,-430.55 -493,-375.82 -440,-322.82 -321.83,-322.82 -279.14,-365.51 X1.1 ; U2.7 v1(-425,-838.74)
  Signal Layer Bottom w8: v1(-480,-443.55) -461,-462.55 -461,-802.74 v1(-425,-838.74)
  Bottom Layer w8: C9.1 v1(-480,-443.55)
NetC10_1: C10.1 U2.8 X1.4 | length 718.3
  Top Layer w8: U2.8 -449,-870.24 -449,-877.06 -391.06,-877.06 -382.24,-868.24 -382.24,-852.36 -382.53,-852.07 -382.53,-825.53 v1(-322,-765) ; v1(-431,-432) -420,-452.13 X1.4
  Signal Layer Top w8: v1(-431,-432) -300,-563 -300,-743 v1(-322,-765)
  Bottom Layer w8: v1(-322,-765) -321.45,-765.55 C10.1
NetD1_2: D1.2 RA1.7 | length 246.8
  Top Layer w8: D1.2 v1(-162.74,-1093.74)
  Bottom Layer w8: v1(-162.74,-1093.74) -120.4,-1093.74 -54,-1027.34 -54,-985 -80,-985 RA1.7
NetD2_2: D2.2 RA1.6 | length 501.5
  Top Layer w8: D2.2 -260,-1064 -250,-1054 v1(-162,-1054)
  Signal Layer Top w8: v1(-162,-1054) -131.81,-1023.81 -131.81,-998.93 -135.81,-994.94 -135.81,-962.22 -130,-956.41 -130,-884 -120,-874 -80,-874 -60,-894 -60,-953 v1(-53,-960)
  Bottom Layer w8: RA1.6 -64.5,-948.5 v1(-53,-960)
NetD3_1: D3.1 RA1.8 | length 368.5
  Top Layer w8: D3.1 -320,-1143 v1(-310,-1143)
  Signal Layer Top w8: v1(-310,-1143) -167,-1143 -113.81,-1089.81 -110,-1031 v1(-102,-1031)
  Bottom Layer w8: v1(-102,-1031) -82.5,-1011.5 RA1.8
NetD4_1: D4.1 RA1.5 | length 636.8
  Top Layer w8: D4.1 -374.92,-1186.26 -374.92,-1206 -354.92,-1226 v1(-311,-1226)
  Signal Layer Top w8: v1(-311,-1226) -275,-1190 -159,-1190 -89,-1120 -89,-1062.18 -80.16,-1053.34 -80.16,-917.84 v1(-102,-896)
  Bottom Layer w8: v1(-102,-896) -90,-896 -80,-906 RA1.5
NetS2_2: S2.2 U1.16 | length 264.9
  Top Layer w8: S2.2 v1(-305.59,-1321)
  Bottom Layer w8: U1.16 -405.84,-1220.75 v1(-305.59,-1321)
NetS2_3: S2.3 U1.15 | length 337.6
  Top Layer w8: v1(-280,-1399) S2.3
  Signal Layer Bottom w8: v1(-431,-1246) -390,-1246 -336,-1300 -336,-1343 v1(-280,-1399)
  Bottom Layer w8: U1.15 -431.34,-1246.34 v1(-431,-1246)
RED_RX: RA1.2 U1.23 | length 464.9
  Signal Layer Bottom w8: v1(-379,-1026) -379,-1049 -340,-1088 -300,-1088 -160.23,-948.23 -153.6,-948.23 v1(-152.91,-948.91)
  Bottom Layer w8: U1.23 -394.61,-1041.61 v1(-379,-1026) ; v1(-152.91,-948.91) -152.71,-948.71 -129.2,-948.71 RA1.2
RESET: C1.1 RA2.1 S1.5 S3.2 S4.3 S5.3 U2.29 | length 2875.7
  Top Layer w8: S4.3 -525,-200 -505,-180 S3.2 ; S1.5 -466,54 -466,17 -450,1 S3.2 ; v1(-224,-708.5) -247.24,-708.5 -315.75,-640 U2.29 -315.75,-540 -283.75,-508 -160,-508 -138,-486 -138,-280 -192,-226 ; S5.3 -67,-200 -93,-226 -192,-226 ; S3.2 -450,-216 -440,-226 -192,-226 ; S3.2 -238,-180 -192,-226
  Signal Layer Bottom w8: S4.3 -546,-254 -546,-595.99 -495.27,-646.71 -495.27,-824.73 -455,-865 -415.07,-865 -405.64,-855.56 v1(-403.74,-855.56)
  Bottom Layer w8: C1.1 -444.87,-850.13 -429.5,-865.5 -415.57,-865.5 -405.64,-855.56 v1(-403.74,-855.56) ; v1(-224,-708.5) RA2.1
RX: RA2.7 U1.1 | length 241
  Bottom Layer w8: U1.1 -180,-913.66 -174.81,-908.47 -174.81,-875.5 -125,-825.69 -125,-771.5 RA2.7
TX: RA2.6 U1.5 | length 681.3
  Signal Layer Top w8: v1(-185,-675) -141,-675 v1(-86,-730)
  Signal Layer Bottom w8: v1(-295,-1017) -262.5,-984.5 -262.5,-849.66 -268.81,-843.35 -268.81,-703.81 -240,-675 v1(-185,-675)
  Bottom Layer w8: v1(-295,-1017) -294.02,-1016.02 U1.5 ; RA2.6 -96,-740 v1(-86,-730)
VUSB: C6.1 C7.2 REG1.1 S2.1 S5.1 | length 2280.5
  Top Layer w8: v1(-331.18,-1405) S2.1
  Signal Layer Top w8: v1(-160,-125) -80,-45 -45,-45 S5.1
  Signal Layer Bottom w8: v1(-542,-656) -527.27,-656 -513.27,-670 -513.27,-1315.73 -424,-1405 v1(-331.18,-1405)
  Bottom Layer w8: v1(-542,-656) -523.66,-637.66 ; REG1.1 -289.45,-301.08 ; v1(-160,-125) C6.1 -160,-287 -275.37,-287 -289.45,-301.08 ; -523.66,-637.66 -523.31,-637.31 C7.2 -523.66,-637.66 ; -523.66,-637.66 -524,-637.31 -524,-252 -480,-208 -360,-208 -289.45,-278.55 -289.45,-301.08
pads on no net: RA2.4 RA2.8 REG1.4 S2. S2.4 U1.3 U1.6 U1.8 U1.9 U1.10 U1.11 U1.12 U1.13 U1.14 U1.19 U1.24 U1.26 U1.27 U1.28 X1.5

## Polygon pours and split planes (outlines as drawn)
5V on VCC (split plane): 39.9,-1559.9 -639.9,-1559.9 -639.9,179.9 39.9,179.9
GND on GND (split plane): 39.9,-1559.9 -639.9,-1559.9 -639.9,179.9 39.9,179.9

## Silkscreen, mask and mechanical layers (free items; w line width, h text height)
Mechanical 1:
  the board outline again, w6